# Altium PCB kontroler_v1.0_2025-09-13.pcbdoc
Units mil, origin at the board's own origin, x right, y up, seen from the top; angles counter-clockwise.
Board outline 2085 x 1461.91 mil, 2 copper layers (Top Layer, Bottom Layer); 18 components, 24 nets, 66 pads, 14 vias.
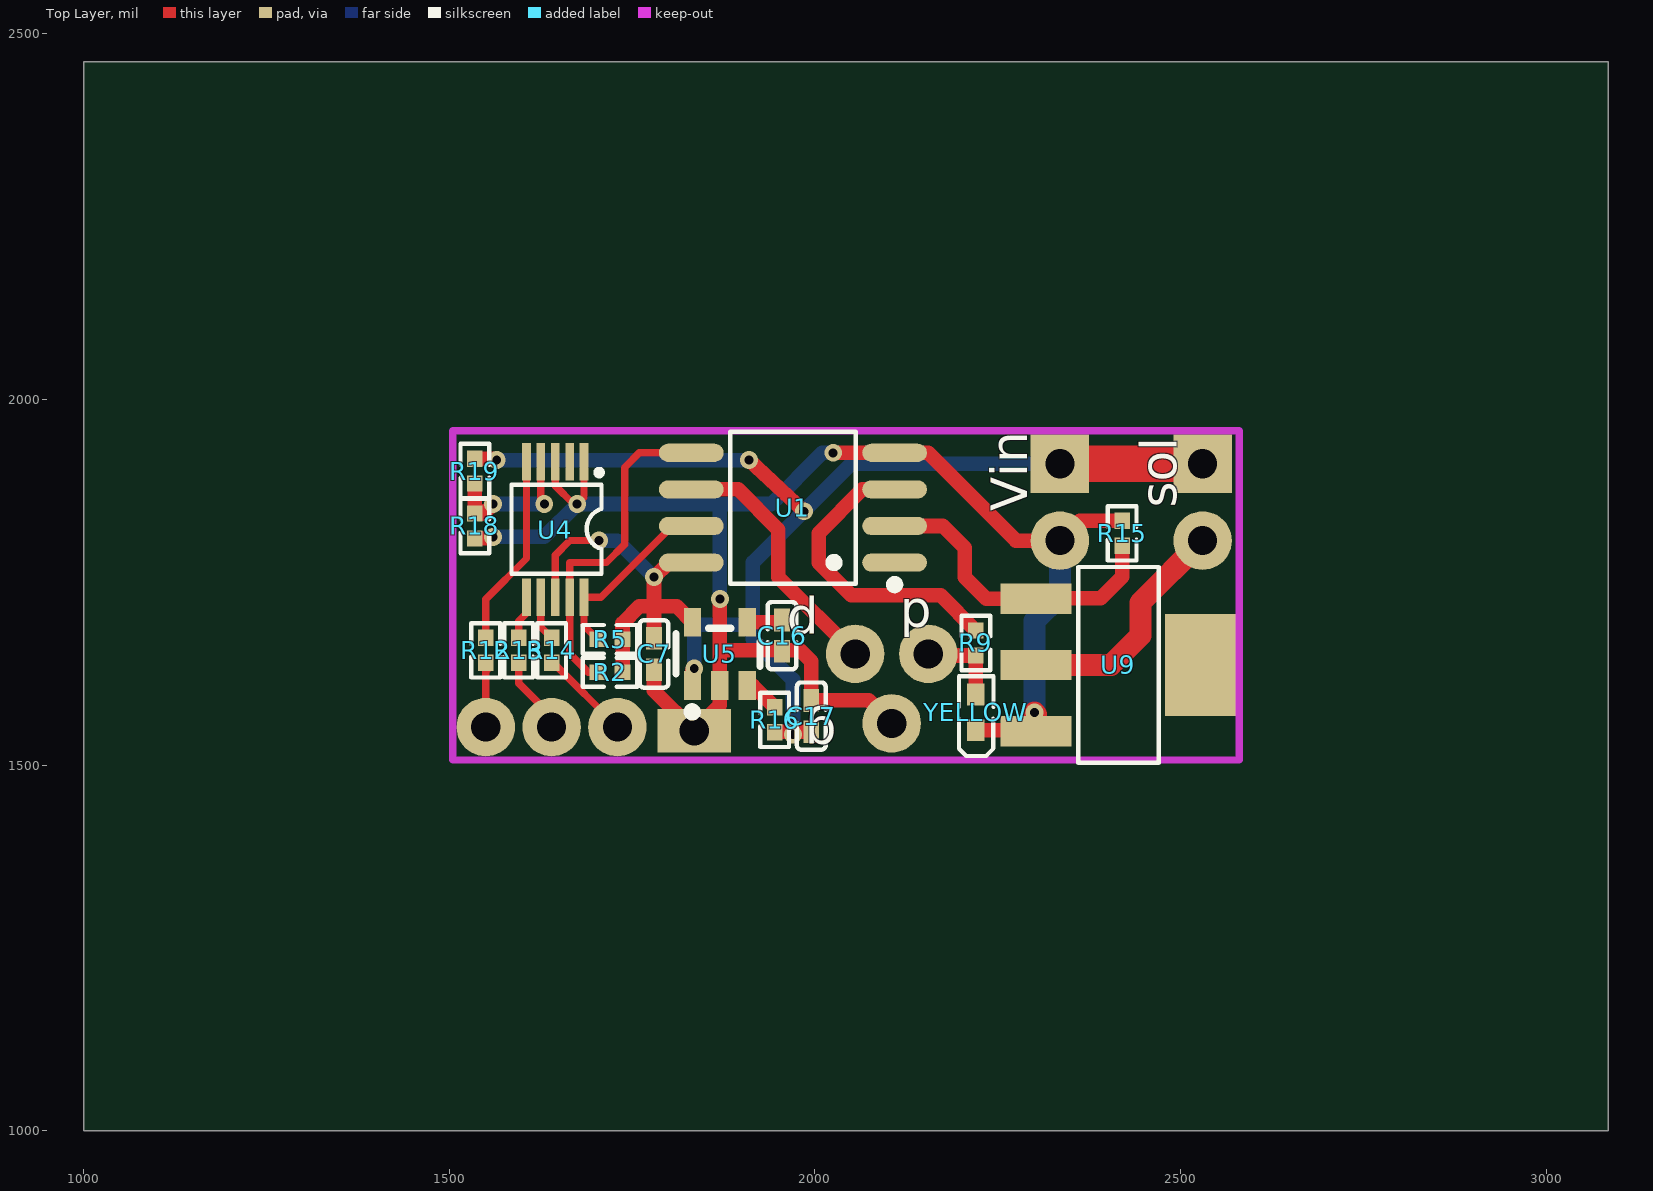
[diagram p0: Top Layer view]
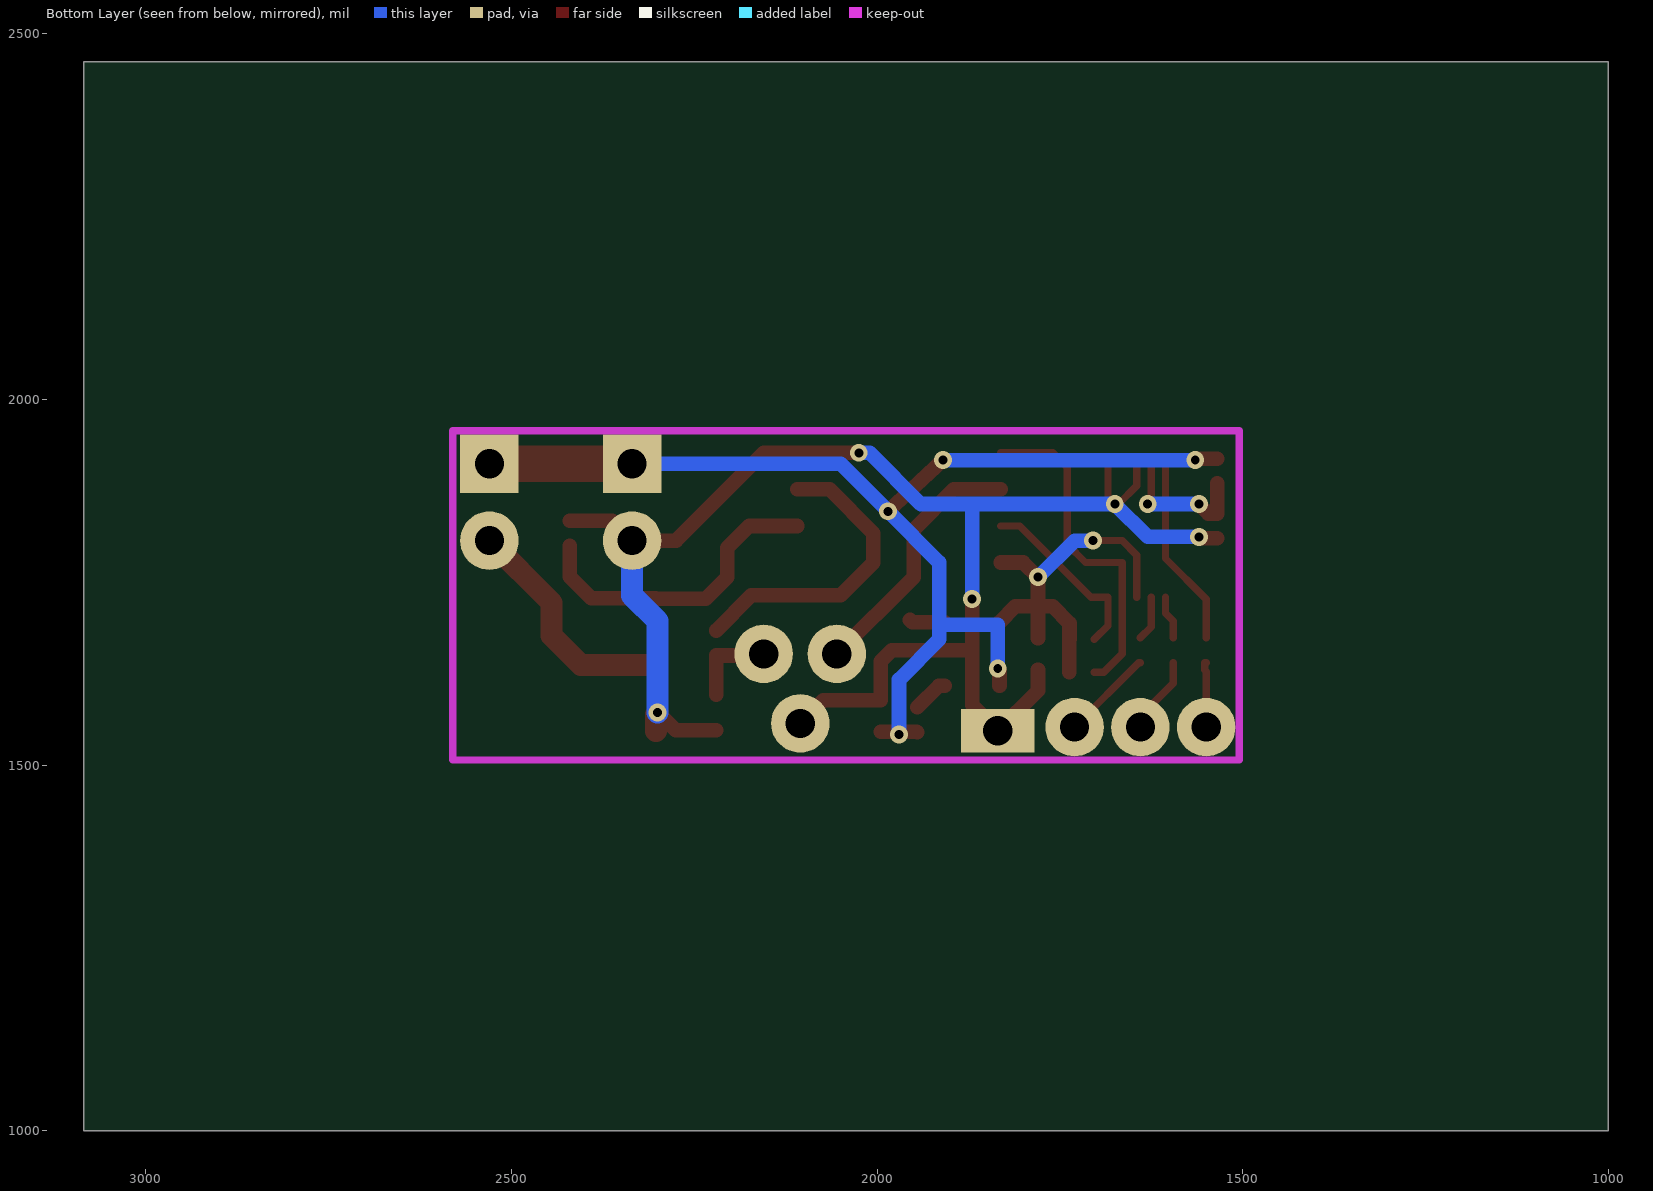
[diagram p1: Bottom Layer view, seen from below]

## Layer stack, top to bottom
Top Layer: signal copper (thickness not stored)
Dielectric: dielectric 12.6, FR-4, Dk 4.8
Bottom Layer: signal copper (thickness not stored)

## Board outline
3085,1000 1000,1000 1000,2461.91 3085,2461.91

## Components (designator, comment, footprint, x,y, rotation, side; value= is the part's Value field where it differs from the comment)
C7 "C0402" C0402 1780,1651.91 r90 top
C16 "C0402" C0402 1955,1676.91 r90 top
C17 "C0402" C0402 1995,1566.91 r90 top
R2 "R0402" R0402 1720,1626.91 r180 top
R5 "R0402" R0402 1720,1671.91 r180 top
R9 "R0402" R0402 2220,1666.91 r270 top
R12 "R0402" R0402 1550,1656.91 r270 top
R13 "R0402" R0402 1595,1656.91 r270 top
R14 "R0402" R0402 1640,1656.91 r270 top
R15 "R0402" R0402 2420,1816.91 r270 top
R16 "R0402" R0402 1945,1561.91 r90 top
R18 "R0402" R0402 1535,1826.91 r270 top
R19 "R0402" R0402 1535,1901.91 r270 top
U1 "attiny85" SOIC-8_L5.3-W5.3-P1.27-LS8.0-BL 1970,1851.91 r90 top
U4 "ads1115" VSSOP-10_L3.0-W3.0-P0.50-LS4.9-BL 1645,1821.91 r180 top
U5 "SOT-23-5_L2.9-W1.6-P0.95-LS2.8-BR" SOT-23-5_L2.9-W1.6-P0.95-LS2.8-BR 1870,1651.91 r270 top
U9 "SOT-223_L6.5-W3.5-P2.30-LS7.0-BR" SOT-223_L6.5-W3.5-P2.30-LS7.0-BR 2415,1636.91 r180 top
YELLOW "LED0402Y" LED0402-R-RD 2220,1571.91 r90 top

## Footprints (in the part's own frame and the unit in brackets; to place one, negate y for a bottom-side part, rotate by r counter-clockwise, add the part's x,y. Pads: shape width x height; smd on the part's side, far side on the other; paste and mask are expansions set on the pad)
C0402 [mm]
  rect 0.79x0.54 smd paste-100 mask+0.051: 1(-0.545,0) 2(0.545,0)
  silkscreen extent -1.17,-0.5 1.17,0.5
LED0402-R-RD [mm]
  rect 0.75x0.6 smd paste+0 mask+0.051: 1(0.623,0) 2(-0.623,0)
  silkscreen extent -1.51,-0.61 1.26,0.58
R0402 [mm]
  rect 0.566x0.54 smd paste-100 mask+0.051: 1(-0.433,0) 2(0.433,0)
  silkscreen extent -0.94,-0.5 0.94,0.5
SOIC-8_L5.3-W5.3-P1.27-LS8.0-BL [mm]
  oval 0.63x2.25 smd paste+0 mask+0.051: 1(-1.905,-3.53) 2(-0.635,-3.53) 3(0.635,-3.53) 4(1.905,-3.53) 5(1.905,3.53) 6(0.635,3.53) 7(-0.635,3.53) 8(-1.905,3.53)
  silkscreen extent -2.82,-3.68 2.64,2.18
SOT-23-5_L2.9-W1.6-P0.95-LS2.8-BR [mm]
  rect 1x0.6 smd paste+0 mask+0.05: 1(1.1,-0.95) 2(1.1,0) 3(1.1,0.95) 4(-1.1,0.95) 5(-1.1,-0.95)
  silkscreen extent -0.89,-1.52 2.16,1.4
SOT-223_L6.5-W3.5-P2.30-LS7.0-BR [mm]
  rect 2.465x1.05 smd paste+0 mask+0.051: 1(2.858,-2.3) 2(2.857,0) 3(2.857,2.3)
  rect 2.465x3.54 smd paste+0 mask+0.051: 4(-2.857,0)
  silkscreen extent -1.4,-3.4 1.4,3.4
VSSOP-10_L3.0-W3.0-P0.50-LS4.9-BL [mm]
  rect 0.3x1.3 smd paste+0 mask+0.015: 1(-1,-2.35) 2(-0.5,-2.35) 3(0,-2.35) 4(0.5,-2.35) 5(1,-2.35)
  rect 0.3x1.3 smd paste+0 mask+0.051: 6(1,2.35) 7(0.5,2.35) 8(0,2.35) 9(-0.5,2.35) 10(-1,2.35)
  silkscreen extent -1.62,-2.08 1.52,1.54

## Free pads (board coordinates)
  round 80 hole 40 paste+0 mask+1.97: 5(1730,1551.91) 6(1640,1551.91) 7(1550,1551.91)
  rect 100x60 hole 40 paste+0 mask+1.97: 8(1835,1546.91)
  rect 80x80 hole 40 paste+0 mask+2: 9(2335,1911.91) 11(2530,1911.91)
  round 80 hole 40 paste+0 mask+2: 10(2335,1806.91) 12(2530,1806.91) 13(2105,1556.91) 14(2055,1651.91) 15(2155,1651.91)

## Via types
v1: diameter 24.41, hole 12.2, Top Layer to Bottom Layer, tented both sides, 14 vias

## Nets (pads, with @x,y where several pads share a name; then routed paths per layer and width w, separated by ;. In a path a pad name is that pad's centre, name@x,y a point inside that pad or via, vN(x,y) a via of type N, cw(c..) or ccw(c..) an arc to the next point about the centre after c; other vN are vias at no path point)
0: U9.4
3.3V: C7.2 R2.1 R5.1 U1.8 U4.8 U5.5 | length 545.5
  Top Layer w10: U4.8 1644.99,1786.9 1665,1806.91 v1(1705,1806.91)
  Top Layer w20: R5.1 1737,1693.91 1760,1716.91 1810,1716.91 1810.91,1716.91 U5.5 ; R2.1 R5.1 ; C7.2 v1(1780,1756.91) 1800,1776.91 U1.8
  Bottom Layer w20: v1(1705,1806.91) 1730,1806.91 v1(1780,1756.91)
AIN1: R12.1 U4.5 | length 263.5
  Top Layer w10: R12.1 1550,1726.91 1605.6,1782.51 U4.5
AIN2: R13.1 U4.6 | length 59.8
  Top Layer w10: R13.1 1595,1696.91 1605.63,1707.54 U4.6
AIN3: R14.1 U4.7 | length 61.5
  Top Layer w10: U4.7 1625.32,1688.63 R14.1
ALERT: U4.2
BATT: R18.1 R19.2 U4.4 | length 200.7
  Top Layer w10: U4.4 1625.32,1861.59 v1(1630,1856.91)
  Top Layer w20: R19.2 R18.1 1547.04,1843.95 v1(1560,1856.91)
  Bottom Layer w20: v1(1560,1856.91) v1(1630,1856.91)
BYP: C16.2 U5.4 | length 48.9
  Top Layer w20: U5.4 1951.85,1695.22 C16.2
EN5: R16.2 U5.3 | length 49.9
  Top Layer w20: U5.3 1915.35,1608.6 R16.2
GND: C7.1 C16.1 C17.2 pad.8 pad.10 pad.13 R15.1 R18.2 U1.4 U4.1 U4.3 U5.2 U9.3 YELLOW.2 | length 2267
  Top Layer w10: U4.3 1645,1881.91 1670,1856.91 v1(1675,1856.91) 1684.37,1866.28 U4.1
  Top Layer w20: R18.2 1557.96,1809.87 v1(1560,1811.91) ; C7.1 1780,1601.91 pad.8 1869.99,1581.9 U5.2 v1(1870,1726.91) ; 1870,1656.91 1980,1656.91 1995,1641.91 C17.2 2073.54,1588.37 pad.13 ; v1(2025,1926.91) U1.4 ; U1.4@2084,1926.91 2155,1926.91 2275,1806.91 pad.10 2362.04,1833.95 R15.1 ; YELLOW.2 2275.47,1547.38 v1(2300,1571.91) ; U9.3@2296.48,1552.38 U9.3
  Top Layer w30: v1(2300,1571.91) 2302.5,1569.41 U9.3
  Bottom Layer w20: v1(1560,1811.91) 1630,1811.91 v1(1675,1856.91) 1940,1856.91 2010,1926.91 v1(2025,1926.91) ; v1(1870,1726.91) 1870,1856.91
  Bottom Layer w30: v1(2300,1571.91) 2300,1696.91 2335,1731.91 pad.10
GREEN: pad.15 R9.2 YELLOW.1 | length 119.3
  Top Layer w20: pad.15 2157.04,1649.87 R9.2 YELLOW.1
IN1: pad.7 R12.2 | length 90.8
  Top Layer w10: pad.7 1550,1627.82 1552.04,1629.87 1552.04,1639.87 R12.2
IN2: pad.6 R13.2 | length 106.6
  Top Layer w10: R13.2 1595,1611.91 1640,1566.91 pad.6
IN3: pad.5 R14.2 | length 126.4
  Top Layer w10: R14.2 1642.04,1639.87 pad.5
LG: R9.1 U1.3 | length 422.4
  Top Layer w20: U1.3 2065,1876.91 2005,1816.91 2005,1776.91 2050,1731.91 2172,1731.91 R9.1
LR: U1.1
PIEZO: pad.14 U1.6 | length 355.3
  Top Layer w20: U1.6 1895,1876.91 1950,1821.91 1950,1756.91 pad.14
S$84309: 
S$89252: 
SCL: R5.2 U1.7 U4.10 | length 252.2
  Top Layer w10: R5.2 1684.38,1690.49 U4.10 1707.5,1729.41 1805,1826.91 U1.7
SDA: R2.2 U1.5 U4.9 | length 463.4
  Top Layer w10: R2.2 1690,1626.91 1664.69,1652.22 U4.9 1664.7,1776.91 1715,1776.91 1740,1801.91 1740,1906.91 1760,1926.91 U1.5
SOL: pad.12 U9.2 | length 324.3
  Top Layer w30: U9.2 2405,1636.91 2445,1676.91 2445,1721.91 pad.12
SOLSIG: R15.2 U1.2 U9.1 | length 430.4
  Top Layer w20: U1.2 2175,1826.91 2205,1796.91 2205,1756.91 2234.45,1727.46 U9.1 ; U9.1@2302.5,1727.91 2390.55,1727.91 2420,1757.36 R15.2
VIN: C17.1 pad.9 pad.11 R16.1 R19.1 U5.1 | length 1648.1
  Top Layer w20: R19.1 1562.96,1918.95 v1(1565,1916.91) ; U5.1 1832.61,1629.51 v1(1835,1631.91) ; v1(1910,1916.91) v1(1985,1846.91) ; R16.1 1945.58,1545.45 C17.1 1973.54,1545.45 v1(1970,1541.91)
  Top Layer w50: pad.9 pad.11
  Bottom Layer w20: v1(1565,1916.91) v1(1910,1916.91) ; v1(1835,1631.91) 1835,1691.91 1915,1691.91 ; v1(1970,1541.91) 1970,1616.91 1915,1671.91 1915,1691.91 ; pad.9 2050,1911.91 v1(1985,1846.91) 1915,1776.91 1915,1691.91

## Silkscreen, mask and mechanical layers (free items; w line width, h text height)
Top Overlay:
  text "sol" at 2495,1851.91 h50 r90
  text "Vin" at 2290,1846.91 h50 r90
  text "d" at 2160,1726.91 h50 r180
  text "p" at 2005,1716.91 h50 r180
  text "g" at 2030,1566.91 h50 r180